# Altium PCB PCB_Transmit.PcbDoc
Units mil, origin at the board's own origin, x right, y up, seen from the top; angles counter-clockwise.
Board outline 3900 x 2765 mil, 2 copper layers (Top Layer, Bottom Layer); 17 components, 34 nets, 78 pads, 2 vias.
Unrouted connection lines stored in the file: 5.
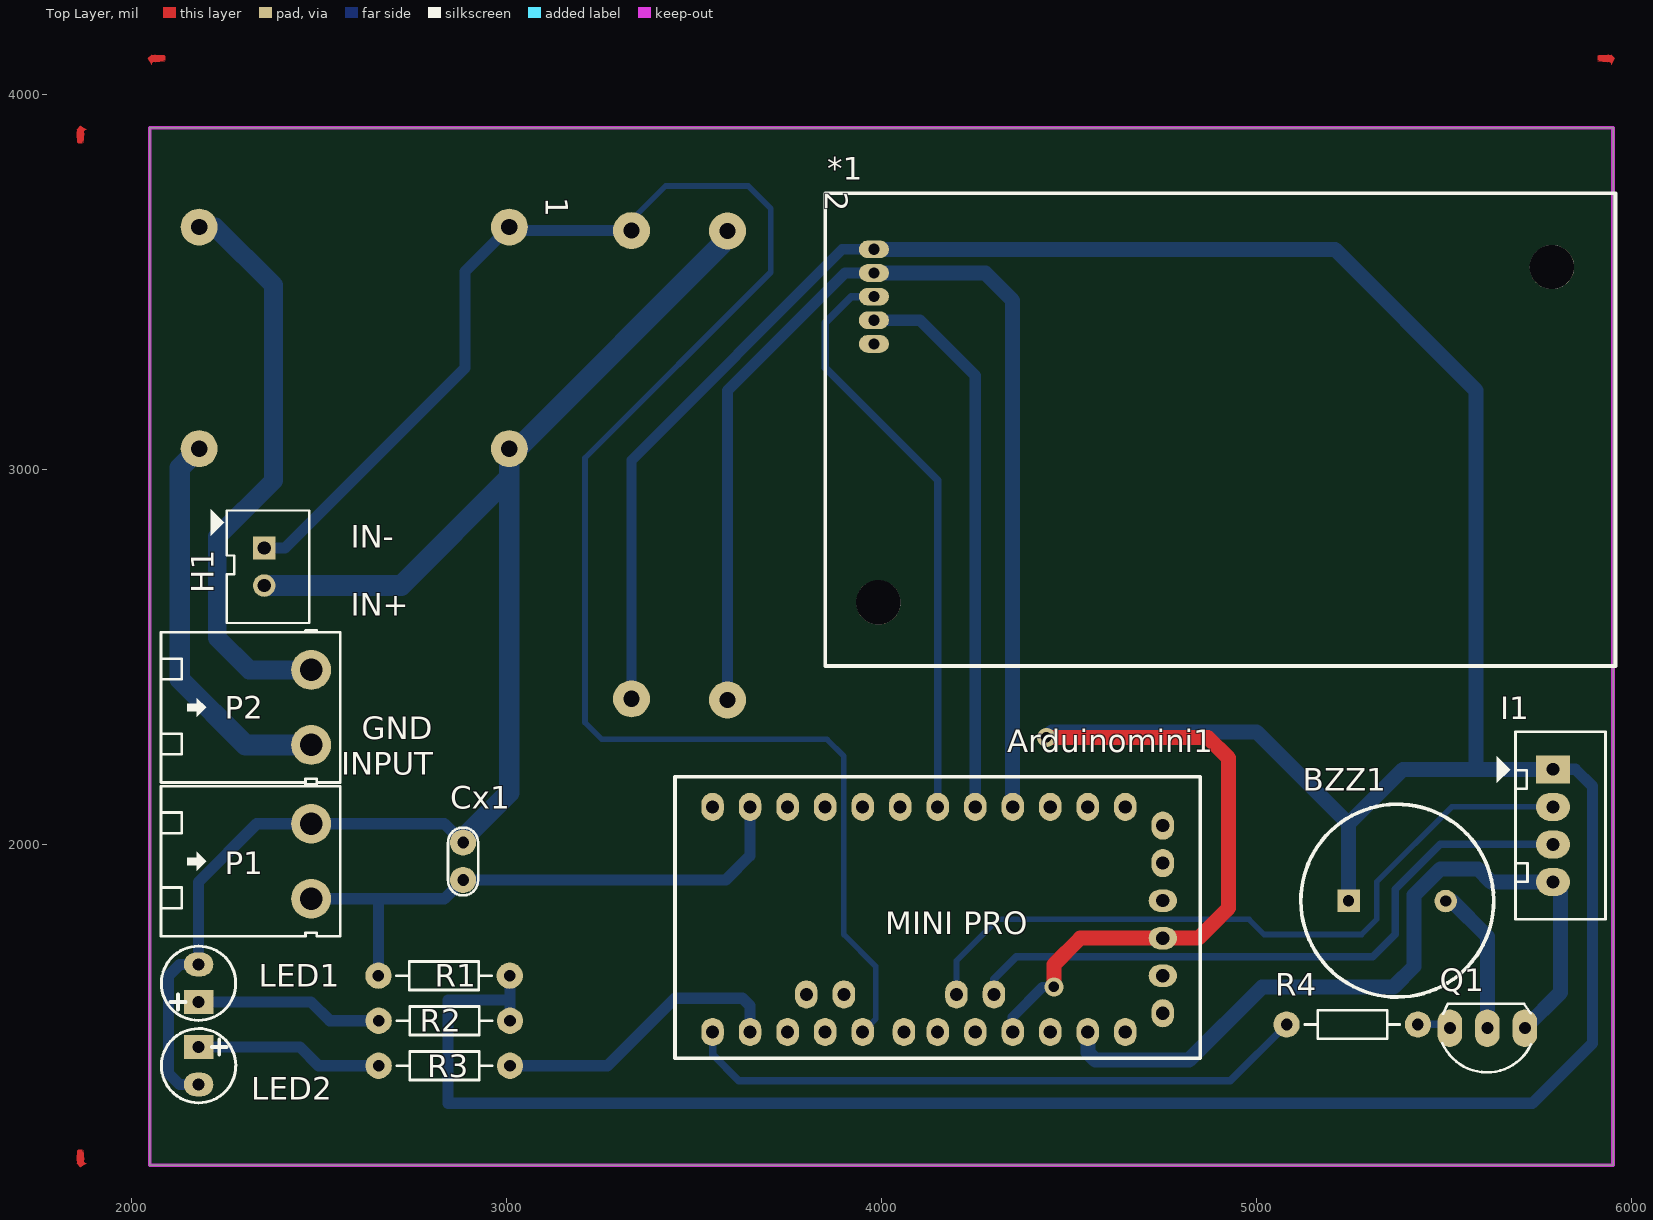
[diagram p0: Top Layer view]
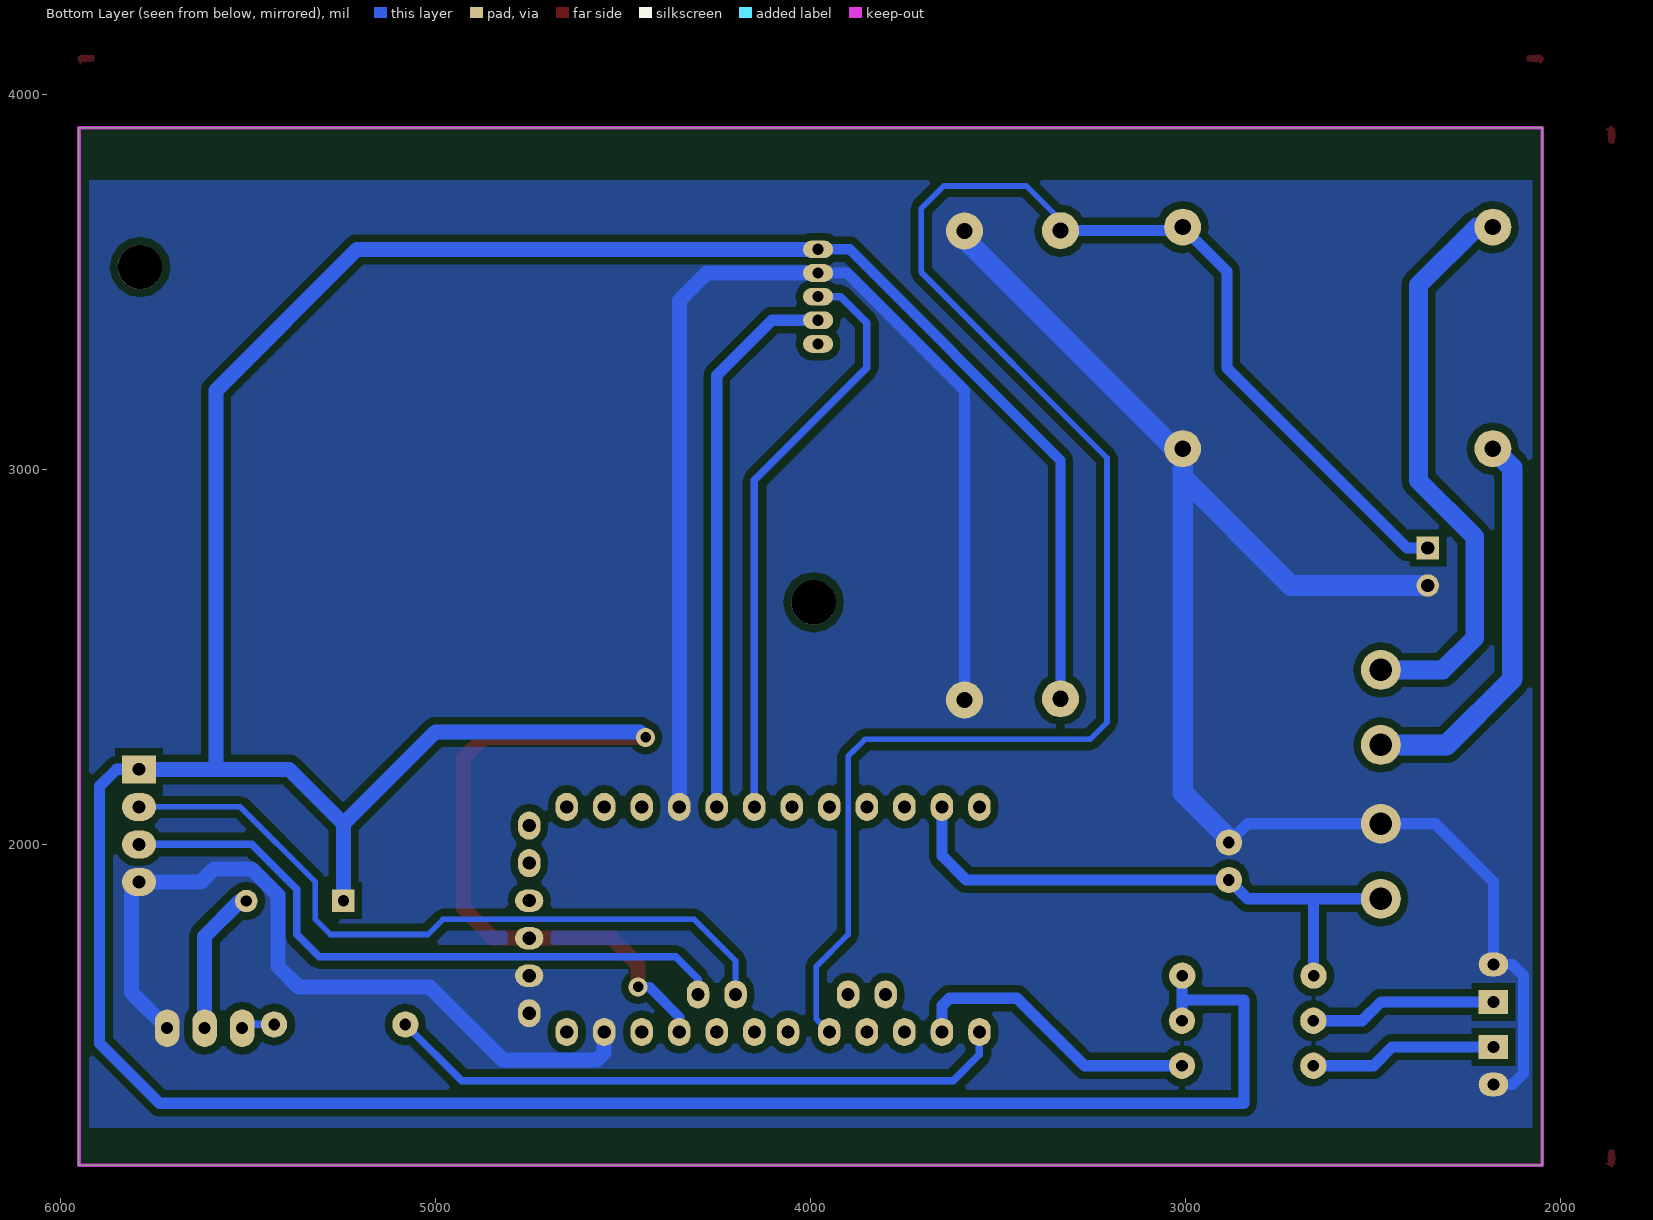
[diagram p1: Bottom Layer view, seen from below]

## Layer stack, top to bottom
Top Solder: solder mask 0.4, Solder Resist, Dk 3.5
Top Layer: signal copper 1.4
Dielectric 1: dielectric 12.6, FR-4, Dk 4.8
Bottom Layer: signal copper 1.4
Bottom Solder: solder mask 0.4, Solder Resist, Dk 3.5

## Board outline
2050,1145 2050,3910 5950,3910 5950,1145

## Design rules (kind name [scope] priority, off if disabled: settings)
Clearance [All] p1: gap=20
PlaneConnect [All] p1: planeconnectstyle=Direct reliefexpansion=20 reliefentries=4 reliefconductorwidth=10 reliefairgap=10
PolygonConnect [All] p1: connectstyle=Direct reliefconductorwidth=10 reliefentries=4 polygonreliefangle="90 Angle" airgapwidth=10
RoutingVias [All] p1: holewidth=28 width=50 viastyle="Through Hole" minholewidth=28 minwidth=50 maxholewidth=28 maxwidth=50
SolderMaskExpansion [All] p1: expansion=4
Width [All] p1: maxlimit=94.49 minlimit=15 preferedwidth=55.12
29 further rules are at their usual default settings.

## Components (designator, comment, footprint, x,y, rotation, side; value= is the part's Value field where it differs from the comment)
1 "SacPin" SacPin_TP4056 2595,3350 r0 top
2 "1" TangAp_MT3608 3460,3010 r90 top
*1 "Lora" Lora 3980,3460 r270 top
Arduinomini1 "ARD_Mini" Arduino_mini 3450,2200 r270 top
BZZ1 "Buzzer" "buzzer 5V" 5375,1850 r0 top
Cx1 "104" CN1 2885,2005 r270 top
H1 "Header2" Header2 2350,3120 r270 top
I1 "JP4" CON4 5790,2200 r270 top
LED1 "LED3" LED3mm 2180,1630 r90 top
LED2 "LED3" LED3mm 2180,1410 r270 top
P1 "Header 2" HED2T 2480,1955 r270 top
P2 "Header 2" HED2T 2480,2365 r270 top
Q1 "C1815" QTO-92 5615,1510 r180 top
R1 "10k" R1/4W 3009.4,1650 r180 top
R2 "1K" R1/4W 2660,1530 r0 top
R3 "220" R1/4W 2660,1410 r0 top
R4 "1k" R1/4W 5080,1520 r0 top

## Footprints (in the part's own frame and the unit in brackets; to place one, negate y for a bottom-side part, rotate by r counter-clockwise, add the part's x,y. Pads: shape width x height; smd on the part's side, far side on the other; paste and mask are expansions set on the pad)
Arduino_mini [mil]
  oval 75x60 hole 35: 0(700,100) 1(700,200) 2(700,300) 3(700,400) 4(700,500) 5(700,610) 6(700,700) 7(700,800) 8(700,900) 9(700,1000) 10(700,1100) 11(700,1200) 12(100,100) 13(100,200) 14(100,300) 15(100,400) 16(100,500) 17(100,600) 18(100,700) 19(100,800) 20(100,900) 21(100,1000) 22(100,1100) 23(100,1200) 24(600,750) 25(600,850) 26(600,350) 27(600,450) 34(650,1300) 38(250,1300) 39(150,1300)
  oval 60x75 hole 35: 35(550,1300) 36(450,1300) 37(350,1300)
  silkscreen extent 20,0 770,1400, body extent 60,30 760,1570, height 274
"buzzer 5V" [mil]
  rect 60x60 hole 30: 1(-130,0)
  round 60 hole 30: 2(129,-1)
  silkscreen extent -257,-257 257,257, body extent -236,-236 236,236, height 345
CN1 [mil]
  round 70 hole 31: 1(0,0) 2(100,0)
  silkscreen extent -40,-40 141,40, body extent -60,-30 170,37, height 265
CON4 [mil]
  rect 75x90 hole 34: 1(0,0)
  oval 75x90 hole 34: 2(100,0) 3(200,0) 4(300,0)
  silkscreen extent -100,-150 400,140, body extent -90,-90 398,136, height 276
Header2 [mil] "CON2"
  rect 60x60 hole 35.43: 1(330,5)
  round 60 hole 35.43: 2(430,5)
  silkscreen extent 227,-137 530,125, body extent 262,-65 498,112, height 236
HED2T [mm] "Header 2, 2 pin, hight 300mil, Pin to Pin 200, Colour Green"
  round 2.7 hole 1.524: 1(-2.54,0) 2(2.54,0)
  silkscreen extent -5.21,-10.16 5.08,1.98, body extent -5,-10.14 5,1.86, height 8.47
LED3mm [mm]
  rect 1.6x2 hole 0.8: 1(-1.27,0)
  oval 1.6x2 hole 0.8: 2(1.27,0)
  silkscreen extent -2.52,-2.51 2.51,2.52, body extent -1.99,-1.5 1.99,1.99, height 5.38
Lora [mm] "HKW_52TR"
  oval 1.2x2.032 hole 0.762: 1(-3.2,0) 2(-1.6,0) 3(0,0) 4(1.6,0) 5(3.2,0)
  round 3 hole 3: 6(-2,45.9) 6(20.7,0.3)
  silkscreen extent -7,-3.3 25,50.2, body extent -7,-3.3 25,160.31, height 4.67
QTO-92 [mil] "TO-92"
  oval 66x100 hole 32: 1(-100,0) 2(0,0) 3(100,0)
  silkscreen extent -117,-65 120,118, body extent -109,-66 109,95, height 245
R1/4W [mil] "R 1/4W, 2 Pin, 350mil"
  round 70 hole 31: 1(0,0) 2(350,0)
  silkscreen extent 48,-38 302,38, body extent -40,-47 386,47, height 111
SacPin_TP4056 [mm] "TP4056"
  round 2.5 hole 1.1: 1(-10.5,7.5) 2(-10.5,-7.5) 3(10.5,7.5) 4(10.5,-7.5)
  body extent -14.43,-9.5 12.5,9.5, height 4.14
TangAp_MT3608 [mm] "MT3608"
  round 2.5 hole 1.1: 1(-15.8,3.2) 2(-15.875,-3.3) 3(15.9,3.2) 4(15.875,-3.3)
  body extent -18.5,-9.2 18.5,8.51, height 4.67

## Part data
2: library part "Tang Ap"
Arduinomini1: library part Arduino_mini
Cx1: library part "Cap Ceramic", "Cremic For Xtal 1pF => 100pF"
H1: "Header IDC, 2 x 1 Pin Vertical 2.54mm Pitch (Non-Boxed, Male)"
I1: library part Con4, "Connector 4"
LED1 LED2: library part "LED 3mm", "LED 3mm"
P1 P2: "Header, 2-Pin"
Q1: "NPN 600mW, ECB"
R1 R4: library part R, "Resistor 1/4W"
R2 R3: library part Res, "Res"

## Via types
v1: diameter 50, hole 28, Top Layer to Bottom Layer, 2 vias

## Nets (pads, with @x,y where several pads share a name; then routed paths per layer and width w, separated by ;. In a path a pad name is that pad's centre, name@x,y a point inside that pad or via, vN(x,y) a via of type N, cw(c..) or ccw(c..) an arc to the next point about the centre after c; other vN are vias at no path point)
2: *1.4 Arduinomini1.19 | length 1480.9
  Bottom Layer w30: *1.4 4102.99,3397.01 4250,3250 Arduinomini1.19
3: *1.3 Arduinomini1.18 | length 1573.3
  Bottom Layer w20: *1.3 3920,3460 3850,3390 3850,3270 4150,2970 Arduinomini1.18
4: Arduinomini1.17
5: Arduinomini1.16
6: Arduinomini1.15
7: Arduinomini1.14
8: Arduinomini1.13 Cx1.2 P1.2 R1.2 | length 1553.4
  Bottom Layer w30: P1.2 2657.5,1855 ; R1.2 2659.4,1853.1 2657.5,1855 ; Arduinomini1.13 3650,1970 3585,1905 Cx1.2 2835,1855 2657.5,1855
9: Arduinomini1.12
10: Arduinomini1.0 R4.1 | length 1681.1
  Bottom Layer w20: Arduinomini1.0 3550,1440 3620,1370 4930,1370 R4.1
11: Arduinomini1.1 R3.2 | length 792.8
  Bottom Layer w30: R3.2 3270,1410 3450,1590 3630,1590 3650,1570 Arduinomini1.1
12: Arduinomini1.2
13: Arduinomini1.3
+IN: 1.1 P2.1 | length 1550
  Bottom Layer w50: 1.1 2224.72,3645.28 2380,3490 2380,2970 2230,2820 2230,2550 2315,2465 P2.1
-IN: 1.2 P2.2 | length 1058.6
  Bottom Layer w55.12: 1.2 2130,3003.11 2130,2440 2305,2265 P2.2
A0: 1.3 2.3 Arduinomini1.4 H1.1 | length 5028.5
  Bottom Layer w15: 2.3 3334.02,3664.02 3425,3755 3645,3755 3705,3695 3705,3525 3210,3030 3210,2325 3255,2280 3855,2280 3900,2235 3900,1760 3985,1675 3985,1535 Arduinomini1.4
  Bottom Layer w30: H1.1 2410,2790 2890,3270 2890,3526.89 2999.09,3635.98 2.3
A1: Arduinomini1.5
A2: Arduinomini1.6
A3: Arduinomini1.7
A4: Arduinomini1.24 I1.2 | length 1941.5
  Bottom Layer w15: Arduinomini1.24 4200,1690 4310,1800 4980,1800 5020,1760 5280,1760 5320,1800 5320,1900 5520,2100 I1.2
A5: Arduinomini1.25 I1.3 | length 1749.4
  Bottom Layer w20: Arduinomini1.25 4300,1640 4360,1700 5310,1700 5370,1760 5370,1880 5490,2000 I1.3
A6: Arduinomini1.26
A7: Arduinomini1.27
DTR: Arduinomini1.39
GND: 1.4 2.2 2.4 *1.2 Arduinomini1.10 Arduinomini1.20 Arduinomini1.34 Arduinomini1.35 Cx1.1 H1.2 I1.4 LED1.2 LED2.2 P1.1 Q1.1 | length 9335.3
  Bottom Layer w30: LED2.2 2129.37,1360 2100,1389.37 2100,1650 2130,1680 LED1.2 2180,1900 2335,2055 P1.1 2835,2055 Cx1.1 ; 2.2 3589.92,3209.92 3902.99,3522.99 *1.2
  Bottom Layer w40: *1.2 4277.01,3522.99 4350,3450 Arduinomini1.20 ; Arduinomini1.10 4550,1445 4570,1425 4820,1425 5015,1620 5365,1620 5420,1675 5420,1865 5490,1935 5590,1935 5625,1900 I1.4 5810,1880 5810,1605 Q1.1
  Bottom Layer w55.12: H1.2 2720,2690 3008.39,2978.39 ; Cx1.1 2885,2015 3008.39,2138.39 3008.39,2978.39 ; 2.4 3589.92,3614.92 3029.72,3054.72 1.4 3008.39,2978.39
GPIO_LORA: *1.5
NetBZZ1_2: BZZ1.2 Q1.2 | length 394.9
  Bottom Layer w40: BZZ1.2 5521,1849 5615,1755 Q1.2
NetLED1_1: LED1.1 R2.1 | length 500.7
  Bottom Layer w30: LED1.1 2480,1580 2530,1530 R2.1
NetLED2_1: LED2.1 R3.1 | length 500.7
  Bottom Layer w30: LED2.1 2450,1460 2500,1410 R3.1
NetQ1_3: Q1.3 R4.2 | length 89.1
  Bottom Layer w20: R4.2 5505,1520 Q1.3
RAW: Arduinomini1.11
RST: Arduinomini1.9 Arduinomini1.21
RXD: Arduinomini1.22 Arduinomini1.37
TXD: Arduinomini1.23 Arduinomini1.38
VCC: 2.1 *1.1 Arduinomini1.8 Arduinomini1.36 BZZ1.1 I1.1 R1.1 R2.2 | length 12171.5
  Top Layer w40: v1(4440,2285) 4870,2285 4925,2230 4925,1830 4845,1750 Arduinomini1.36 4530,1750 4460,1680 v1(4460,1620)
  Bottom Layer w27.56: 2.1 3334.02,3024.02 3895.98,3585.98 *1.1 ; Arduinomini1.8 4350,1540 4430,1620 v1(4460,1620)
  Bottom Layer w30: R1.1 3010,1649.4 3010,1585 ; R2.2 3010,1585 ; I1.1 5850,2200 5895,2155 5895,1470 5735,1310 2845,1310 2845,1585 3010,1585
  Bottom Layer w40: *1.1 5209.02,3585.98 5585,3210 5585,2200 ; v1(4440,2285) 4455,2300 5000,2300 5245,2055 ; BZZ1.1 5245,2055 ; I1.1 5585,2200 ; 5245,2055 5390,2200 5585,2200
pads on no net: *1.6

## Polygon pours and split planes (outlines as drawn)
GND on Bottom Layer "Bottom Layer-No Net" (solid, pour order 0): 2060,3765 2065,3770 5935,3770 5935,1250 5940,1245 2050,1245

## Keep-outs
Keep-Out Layer:
  the board outline again, w10

## Other copper
Bottom Layer:
  region net GND: 3671.29,3524.19

## Silkscreen, mask and mechanical layers (free items; w line width, h text height)
Top Overlay:
  text "IN-" at 2585,2790 h60
  text "IN+" at 2585,2610 h60
  text "GND" at 2615,2280 h60
  text "INPUT" at 2560,2185 h60

## Dimensions
2050,3910 to 2050,1145 on Top Layer
2050,3910 to 5950,3910 on Top Layer

## Text inside footprints (layer, text, board x,y; h text height)
Arduinomini1: Top Overlay "MINI PRO" at 4010,1760 h60